# EAGLE board pga460_direct (EAGLE 9.4.2)

Size 160 x 100 mm. Coordinates in mm from the lower left corner, seen from the top.
Outline: 0,0 160,0 160,100 0,100 0,0
Copper layers (1*16): Top 0.035mm / dielectric 1.5mm / Bottom 0.035mm
Design rules "default": minimum track width 6mil, minimum drill 0.35mm, track to track 6mil, track to pad 6mil, pad to pad 6mil, via to via 6mil, smd to smd 6mil, copper to edge 40mil, drill to drill 6mil, minimum pad ring 10mil, minimum via ring 8mil, stop-mask expansion 4mil, vias tented up to drill 0mil, thermal gap 10mil

## Footprints (pad centres in the part's own frame; a part is rotated, then mirrored left to right if it is on the bottom)
M0805 = smd 1.3 x 1.6: 1 -0.95,0; 2 0.95,0
C0805 = smd 1.3 x 1.5: 1 -0.85,0; 2 0.85,0
SMA = smd 1.8 x 1.7: A -2.05,0; K 2.05,0
SOP65P640X120-16N = smd 1.6 x 0.45: 1 -2.875,2.275; 2 -2.875,1.625; 3 -2.875,0.975; 4 -2.875,0.325; 5 -2.875,-0.325; 6 -2.875,-0.975; 7 -2.875,-1.625; 8 -2.875,-2.275; 9 2.875,-2.275; 10 2.875,-1.625; 11 2.875,-0.975; 12 2.875,-0.325; 13 2.875,0.325; 14 2.875,0.975; 15 2.875,1.625; 16 2.875,2.275
1X05 = drill 1.016 pad 1.88: 1 0,0; 2 2.54,0; 3 5.08,0; 4 7.62,0; 5 10.16,0
1X02_LOCK = drill 1.016 pad 1.88: 1 -0.178,0; 2 2.718,0
R0805 = smd 1.3 x 1.5: 1 -0.95,0; 2 0.95,0
SOT23 = smd 1 x 1.4: 1 -0.95,-1.1; 2 0.95,-1.1; 3 0,1.1

## Placement (x,y rotation side)
10K\  [M0805]  76.2,55.88 0 top
C1  0.1uF  [C0805]  82.55,50.8 0 top
C2  0.1uF  [C0805]  76.2,50.8 0 top
C3  0.1uF  [C0805]  88.9,57.15 0 top
C4  390pF  [C0805]  88.9,50.8 0 top
C5  0.033uF  [C0805]  72.39,44.45 0 top
D2  1N4007  [SMA]  90.17,38.1 0 top
IC1  PGA460TPWQ1  [SOP65P640X120-16N]  86.36,44.45 0 top
J1  [1X05]  72.39,62.23 0 top
MURATA  ma58mf14-7n  [1X02_LOCK]  81.28,57.15 0 top
R1  10k  [R0805]  82.55,38.1 0 top
R2  10k  [R0805]  77.47,38.1 0 top
R3  10k  [R0805]  72.39,38.1 0 top
T1  BSS84  [SOT23]  86.36,62.23 0 top

## Library data of the parts
10K\ R1-R3 = rcl; SPICEPREFIX: R
C1-C5 = adafruit
D2 = casovac
IC1 = PGA460TPWQ1; DESCRIPTION: Analog Front End - AFE Automotive Ultrasonic Signal Processor & Transducer Driver 16-TSSOP -40 to 105; HEIGHT: 1.2mm; MANUFACTURER_NAME: Texas Instruments; MANUFACTURER_PART_NUMBER: PGA460TPWQ1; MOUSER_PART_NUMBER: 595-PGA460TPWQ1; MOUSER_PRICE-STOCK: https://www.mouser.com/Search/Refine.aspx?Keyword=595-PGA460TPWQ1
J1 MURATA = SparkFun-Connectors
T1 = nxp_60_1_1

## Nets
5V: J1.3 R2.2 R3.2
GND: 10K\.1 C1.2 C2.2 C3.2 C5.1 IC1.1 IC1.4 IC1.6 J1.4 MURATA.2 R1.2
INN: C5.2 IC1.3
INP: C4.2 IC1.2
N$1: IC1.12 R1.1
N$2: C1.1 D2.K IC1.15
N$3: C3.1 IC1.16
N$4: IC1.9 R3.1
N$7: C2.1 IC1.14
OUTA: 10K\.2 C4.1 IC1.5 MURATA.1 T1.3
OUTB: IC1.7 T1.1
RXD: IC1.11 J1.1
TXD: IC1.10 J1.2 R2.1
VPWR: D2.A J1.5 T1.2

## Tracks (layer width: path | path; a pad name or v marks a point on that pad's centre or on a via)
5V  (2 unrouted)
GND  (10 unrouted)
INN  (1 unrouted)
INP  (1 unrouted)
N$1  (1 unrouted)
N$2  (2 unrouted)
N$3  (1 unrouted)
N$4  (1 unrouted)
N$7  (1 unrouted)
OUTA  (4 unrouted)
OUTB  (1 unrouted)
RXD  (1 unrouted)
TXD  (2 unrouted)
VPWR  (2 unrouted)